# EAGLE board interactiveBoard (EAGLE 9.6.2)
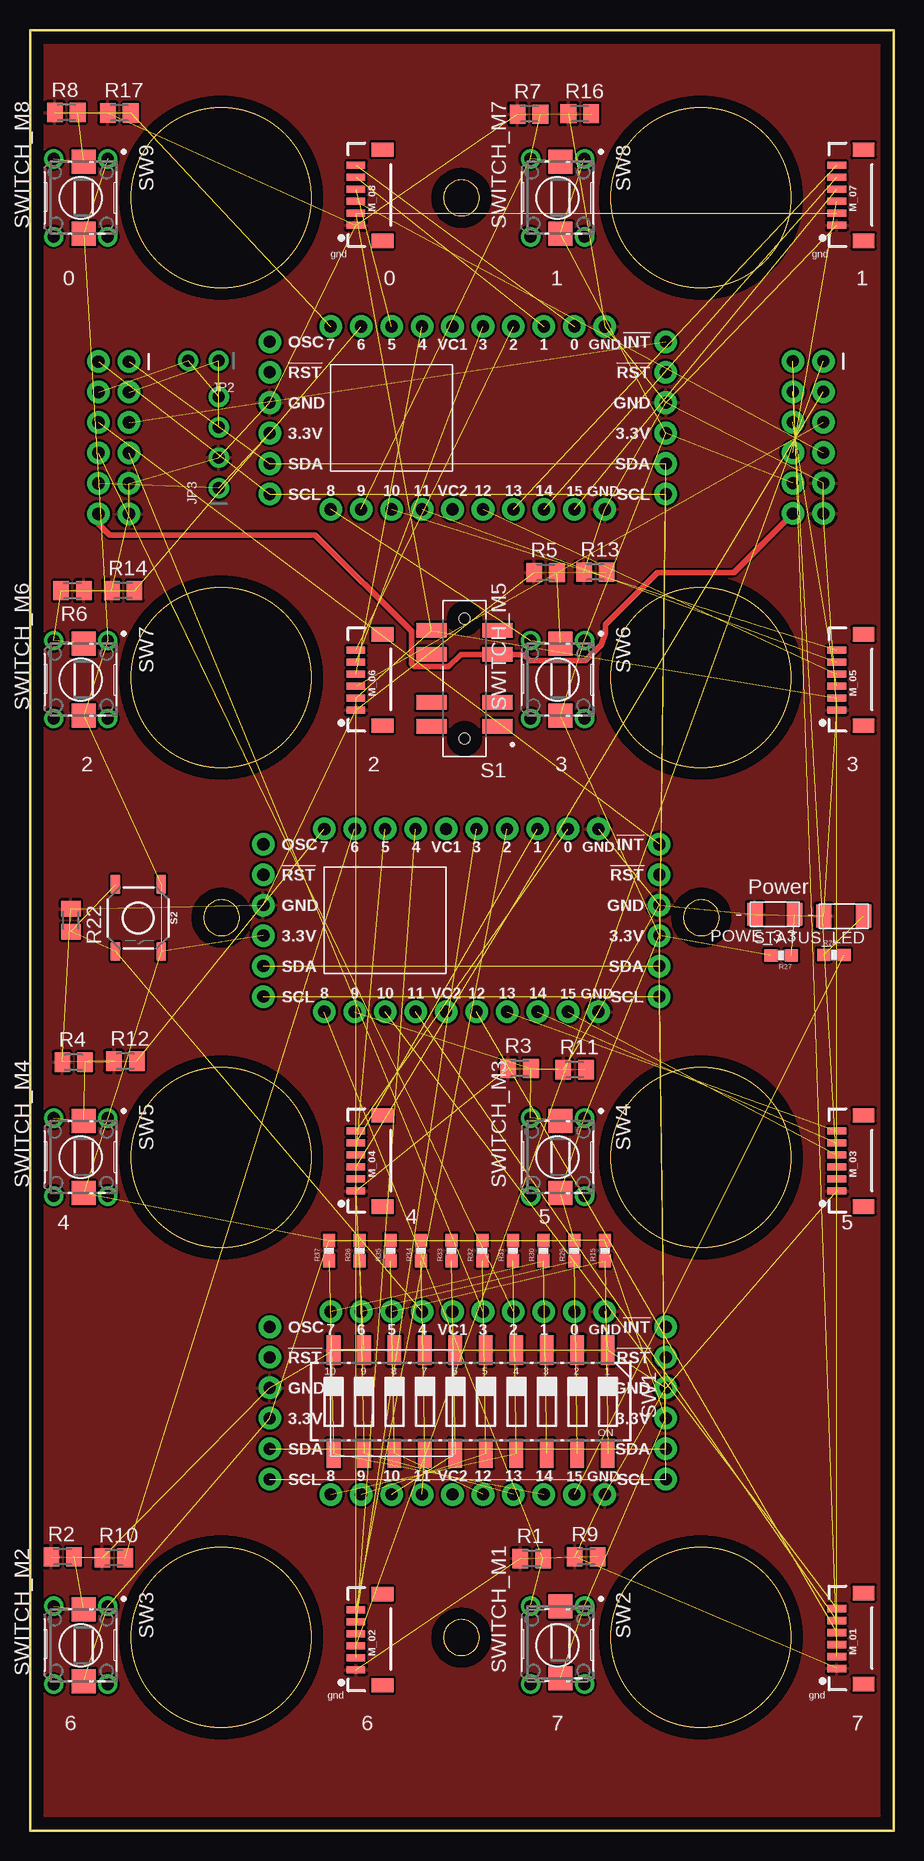
[diagram p0: board, top side]
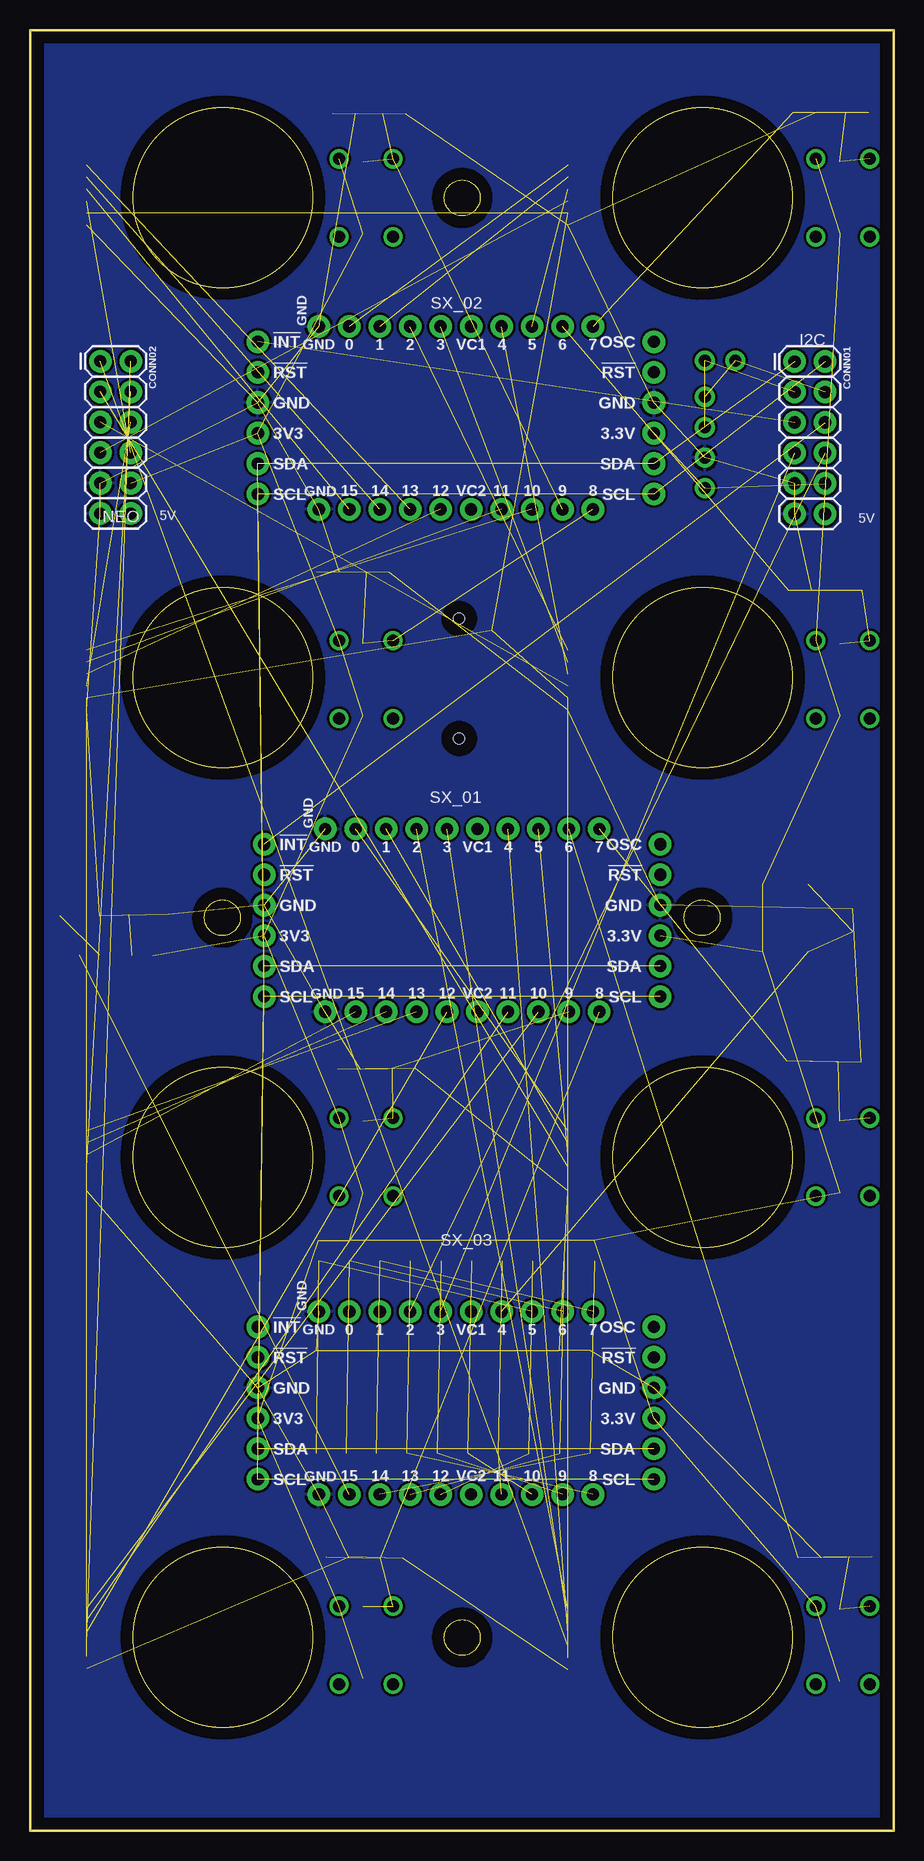
[diagram p1: board, bottom side, seen from below]

Size 72.01 x 150.09 mm. Coordinates in mm from the lower left corner, seen from the top.
Outline: 35.97,14.59 arc180 35.97,17.59 arc180 35.97,14.59
Outline: 15.97,74.59 arc180 15.97,77.59 arc180 15.97,74.59
Outline: 35.97,134.59 arc180 35.97,137.59 arc180 35.97,134.59
Outline: 55.97,74.59 arc180 55.97,77.59 arc180 55.97,74.59
Outline: 72.01,150.09 72.01,0 0,0 0,150.09 72.01,150.09
Outline: circle at 55.94,136.11 radius 7.49
Outline: circle at 55.94,96.11 radius 7.49
Outline: circle at 55.94,56.11 radius 7.49
Outline: circle at 55.94,16.11 radius 7.49
Outline: circle at 15.94,16.11 radius 7.49
Outline: circle at 15.94,56.11 radius 7.49
Outline: circle at 15.94,96.11 radius 7.49
Outline: circle at 15.94,136.11 radius 7.49
Copper layers (1*16): Top 0.035mm / dielectric 1.5mm / Bottom 0.035mm
Design rules "default": minimum track width 6mil, minimum drill 0.35mm, track to track 6mil, track to pad 6mil, pad to pad 6mil, via to via 6mil, smd to smd 6mil, copper to edge 40mil, drill to drill 6mil, minimum pad ring 10mil, minimum via ring 8mil, stop-mask expansion 4mil, vias tented up to drill 0mil, thermal gap 10mil
Net classes: 0 default: width 0.2 mm, clearance 0.2 mm; 1 gnd: width 0.2 mm, clearance 0.2 mm; 2 3v: width 0.45 mm, clearance 0.2 mm; 4 5v: width 0.45 mm, clearance 0.2 mm

## Footprints (pad centres in the part's own frame; a part is rotated, then mirrored left to right if it is on the bottom)
2X6 = drill 1.016 pad 1.88: 1 0,0; 2 0,2.54; 3 2.54,0; 4 2.54,2.54; 5 5.08,0; 6 5.08,2.54; 7 7.62,0; 8 7.62,2.54; 9 10.16,0; 10 10.16,2.54; 11 12.7,0; 12 12.7,2.54
1X02_ROUND = drill 1 pad 1.676: 1 -1.27,0; 2 1.27,0
1X04_ROUND = drill 1 pad 1.676: 1 -3.81,0; 2 -1.27,0; 3 1.27,0; 4 3.81,0
1X06-1MM = smd 0.6 x 1.55: 1 -2.54,1.27; 2 -1.54,1.27; 3 -0.54,1.27; 4 0.46,1.27; 5 1.46,1.27; 6 2.46,1.27 | smd 1.2 x 1.8: P$1 -3.84,-0.955; P$2 3.76,-0.955
LED1206FAB = smd 1.27 x 1.905: 1 -1.651,0; 2 1.651,0
M0805 = smd 1.3 x 1.6: 1 -0.95,0; 2 0.95,0
0603-RES = smd 1.1 x 1: 1 -0.85,0; 2 0.85,0
SW_JS207011SCQNR = smd 2.5 x 1.2: 1 -2.75,4; 2 -2.75,2; 3 -2.75,-2; 4 -2.75,-4; 5 2.75,4; 6 2.75,2; 7 2.75,-2; 8 2.75,-4 | hole 0.9: 0,5; 0,-5
TACTILE_SWITCH_SMD_5.2MM = smd 1.524 x 0.762: 1 -2.794,1.905; 2 2.794,1.905; 3 -2.794,-1.905; 4 2.794,-1.905
CTS-219-10 = smd 1.13 x 2.44: 1 -11.43,-4.3; 2 -8.89,-4.3; 3 -6.35,-4.3; 4 -3.81,-4.3; 5 -1.27,-4.3; 6 1.27,-4.3; 7 3.81,-4.3; 8 6.35,-4.3; 9 8.89,-4.3; 10 11.43,-4.3; 11 11.43,4.3; 12 8.89,4.3; 13 6.35,4.3; 14 3.81,4.3; 15 1.27,4.3; 16 -1.27,4.3; 17 -3.81,4.3; 18 -6.35,4.3; 19 -8.89,4.3; 20 -11.43,4.3
B3F-1000 = drill 1 pad 1.6: 1 -3.25,2.25; 2 3.25,2.25; 3 -3.25,-2.25; 4 3.25,-2.25
DTSM-3 = smd 2 x 2: 1 -3,0; 2 3,0
SX1509_HOLE = drill 1.016 pad 1.88: 0 -7.62,7.62; 1 -7.62,5.08; 2 -7.62,2.54; 3 -7.62,0; 3.3V 1.27,-17.78; 3.3V_2 1.27,15.24; 4 -7.62,-5.08; 5 -7.62,-7.62; 6 -7.62,-10.16; 7 -7.62,-12.7; 8 7.62,-12.7; 9 7.62,-10.16; 10 7.62,-7.62; 11 7.62,-5.08; 12 7.62,0; 13 7.62,2.54; 14 7.62,5.08; 15 7.62,7.62; GND -1.27,-17.78; GND_1 7.62,10.16; GND_2 -7.62,10.16; GND_3 -1.27,15.24; INT -6.35,15.24; OSC -6.35,-17.78; RST -3.81,-17.78; RST_2 -3.81,15.24; SCL 6.35,-17.78; SCL_2 6.35,15.24; SDA 3.81,-17.78; SDA_2 3.81,15.24; VC2 7.62,-2.54; VCC1 -7.62,-2.54

## Placement (x,y rotation side)
CONN01  2X6 FEMALE  [2X6]  8.25,122.45 270 bottom
CONN02  2X6 FEMALE  [2X6]  66.15,122.48 270 bottom
JP2  [1X02_ROUND]  14.45,122.53 180 top
JP3  [1X04_ROUND]  15.75,115.7 90 top
M_01  [1X06-1MM]  68.54,16.05 90 top
M_02  [1X06-1MM]  28.44,15.95 90 top
M_03  [1X06-1MM]  68.54,55.85 90 top
M_04  [1X06-1MM]  28.44,55.85 90 top
M_05  [1X06-1MM]  68.54,95.95 90 top
M_06  [1X06-1MM]  28.44,95.95 90 top
M_07  [1X06-1MM]  68.54,136.35 90 top
M_08  [1X06-1MM]  28.44,136.35 90 top
POWE_3.3  LEDFAB1206  [LED1206FAB]  62.1,76.38 180 top
R1  10k  [M0805]  41.83,22.67 0 top
R2  10k  [M0805]  2.73,22.83 0 top
R3  10k  [M0805]  40.82,63.54 0 top
R4  10K  [M0805]  3.64,64.05 0 top
R5  10k  [M0805]  42.98,104.85 0 top
R6  10k  [M0805]  3.54,103.35 180 top
R7  10k  [M0805]  41.61,143.08 0 top
R8  10k  [M0805]  3.03,143.21 0 top
R9  10K  [M0805]  46.38,22.81 0 top
R10  10K  [M0805]  6.99,22.73 0 top
R11  10K  [M0805]  45.42,63.42 0 top
R12  10K  [M0805]  7.95,64.13 0 top
R13  10K  [M0805]  47.14,104.9 0 top
R14  10K  [M0805]  7.77,103.35 0 top
R15  10K  [0603-RES]  47.93,48.35 90 top
R16  10K  [M0805]  45.85,143.1 0 top
R17  10K  [M0805]  7.44,143.18 0 top
R22  10K  [M0805]  3.41,75.88 270 top
R27  500  [0603-RES]  62.64,72.95 180 top
R28  500  [0603-RES]  67.03,73 0 top
R29  10K  [0603-RES]  45.38,48.35 90 top
R30  10K  [0603-RES]  42.82,48.35 90 top
R31  10K  [0603-RES]  40.27,48.35 90 top
R32  10K  [0603-RES]  37.71,48.35 90 top
R33  10K  [0603-RES]  35.16,48.35 90 top
R34  10K  [0603-RES]  32.61,48.35 90 top
R35  10K  [0603-RES]  30.05,48.35 90 top
R36  10K  [0603-RES]  27.5,48.35 90 top
R37  10K  [0603-RES]  24.94,48.35 90 top
S1  JS207011SCQNR  [SW_JS207011SCQNR]  36.22,96.04 180 top
S2  [TACTILE_SWITCH_SMD_5.2MM]  9.03,76.08 270 top
STATUS_LED  LEDFAB1206  [LED1206FAB]  67.84,76.23 180 top
SW1  219-10  [CTS-219-10]  36.74,35.74 180 top
SW2  B3F-1000  [B3F-1000]  43.99,15.46 270 top
SW3  B3F-1000  [B3F-1000]  4.23,15.46 270 top
SW4  B3F-1000  [B3F-1000]  43.99,56.13 270 top
SW5  B3F-1000  [B3F-1000]  4.23,56.13 270 top
SW6  B3F-1000  [B3F-1000]  43.99,95.94 270 top
SW7  B3F-1000  [B3F-1000]  4.23,95.94 270 top
SW8  B3F-1000  [B3F-1000]  43.99,136.09 270 top
SW9  B3F-1000  [B3F-1000]  4.23,136.09 270 top
SWITCH_M1  DTSM-3  [DTSM-3]  44.24,15.7 90 top
SWITCH_M2  DTSM-3  [DTSM-3]  4.48,15.46 90 top
SWITCH_M3  DTSM-3  [DTSM-3]  44.24,56.13 90 top
SWITCH_M4  DTSM-3  [DTSM-3]  4.48,56.13 90 top
SWITCH_M5  DTSM-3  [DTSM-3]  44.24,95.94 90 top
SWITCH_M6  DTSM-3  [DTSM-3]  4.48,95.94 90 top
SWITCH_M7  DTSM-3  [DTSM-3]  44.24,136.09 90 top
SWITCH_M8  DTSM-3  [DTSM-3]  4.48,136.09 90 top
U$1  SX1509HOLE  [SX1509_HOLE]  37.24,75.87 270 top
U$2  SX1509HOLE  [SX1509_HOLE]  37.77,117.75 270 top
U$3  SX1509HOLE  [SX1509_HOLE]  37.77,35.64 270 top

## Library data of the parts
CONN01 CONN02 = SparkFun-Connectors; PROD_ID: CONN-12423
JP2 JP3 = microbuilder
M_01-M_08 = SparkFun-Connectors; PROD_ID: CONN-08249; SF_ID: GPS-00579
POWE_3.3 STATUS_LED = fab
R1-R14 R16 R17 R22 = resistor
R15 R27-R37 = SparkFun-Resistors; PROD_ID: RES-00824
S1 = JS207011SCQNR; AVAILABILITY: Unavailable; DESCRIPTION: Slide Switch DP3T Surface Mount; MF: C&K; MP: JS207011SCQNR; PACKAGE: None; PRICE: None
S2 = SparkFun-Switches; PROD_ID: SWCH-08247; SF_SKU: COM-08720
SW1 = switch-dil; MF: SLI (CML/IDI); MPN: 219-10PK; OC_FARNELL: unknown; OC_NEWARK: 19M0224
SW2-SW9 = Switch; CREATED_BY: PCBLayout.com; DIGI_KEY_PART_NUMBER: SW400-ND; MANUFACTURER: Omron Electronics Inc-EMC Div; MPN: B3F-1000; PACKAGE: SPST-NO
SWITCH_M1-SWITCH_M8 = switch-tact
U$1-U$3 = SX1509_s

## Nets
0_SX1: M_04.6 U$1.0
0_SX2: M_08.6 U$2.0
0_SX3: U$3.0
1_SX1: M_04.5 U$1.1
1_SX2: M_08.5 U$2.1
1_SX3: U$3.1
2_SX1: M_02.6 U$1.2
2_SX2: M_06.6 U$2.2
2_SX3: CONN01.8 U$3.2
3.3V [3v]: CONN01.10 CONN02.10 JP3.1 R15.2 R27.2 R29.2 R30.2 R31.2 R32.2 R33.2 R34.2 R35.2 R36.2 R37.2 S2.1 S2.2 SW2.1 SW3.1 SW4.1 SW5.1 SW6.1 SW7.1 SW8.1 SW9.1 SWITCH_M1.1 SWITCH_M2.1 SWITCH_M3.1 SWITCH_M4.1 SWITCH_M5.1 SWITCH_M6.1 SWITCH_M7.1 SWITCH_M8.1 U$1.3.3V U$1.3.3V_2 U$2.3.3V U$2.3.3V_2 U$3.3.3V U$3.3.3V_2
3_SX1: M_02.5 U$1.3
3_SX2: M_06.5 U$2.3
3_SX3: CONN01.7 U$3.3
4_SX1: M_02.4 U$1.4
4_SX2: M_06.4 U$2.4
4_SX3: R22.2 S2.3 S2.4 U$3.4
5_SX1: M_04.4 U$1.5
5_SX2: M_08.4 U$2.5
5_SX3: R15.1 SW1.20 U$3.5
6_SX1: R2.2 R10.2 SW3.3 SWITCH_M2.2 U$1.6
6_SX2: R6.2 R14.2 SW7.3 SWITCH_M6.2 U$2.6
6_SX3: R29.1 SW1.19 U$3.6
7_SX1: R4.2 R12.2 SW5.3 SWITCH_M4.2 U$1.7
7_SX2: R8.2 R17.2 SW9.3 SWITCH_M8.2 U$2.7
7_SX3: R30.1 SW1.18 U$3.7
8_SX1: R1.2 R9.2 SW2.3 SWITCH_M1.2 U$1.8
8_SX2: R5.2 R13.2 SW6.3 SWITCH_M5.2 U$2.8
8_SX3: R31.1 SW1.17 U$3.8
9_SX1: R3.2 R11.2 SW4.3 SWITCH_M3.2 U$1.9
9_SX2: R7.2 R16.2 SW8.3 SWITCH_M7.2 U$2.9
9_SX3: R32.1 SW1.16 U$3.9
10_SX1: M_01.6 U$1.10
10_SX2: M_05.6 U$2.10
10_SX3: R33.1 SW1.15 U$3.10
11_SX1: M_01.5 U$1.11
11_SX2: M_05.5 U$2.11
11_SX3: R34.1 SW1.14 U$3.11
12_SX1: M_01.4 U$1.12
12_SX2: M_05.4 U$2.12
12_SX3: R35.1 SW1.13 U$3.12
13_SX1: M_03.6 U$1.13
13_SX2: M_07.6 U$2.13
13_SX3: R36.1 SW1.12 U$3.13
14_SX1: M_03.5 U$1.14
14_SX2: M_07.5 U$2.14
14_SX3: R37.1 SW1.11 U$3.14
15_SX1: M_03.4 U$1.15
15_SX2: M_07.4 U$2.15
15_SX3: R28.2 U$3.15
CAN_RX2: CONN01.4 JP2.2 JP3.4
CAN_TX2: CONN01.3 JP2.1 JP3.3
GND_MCU: CONN01.9 CONN01.11 CONN02.9 CONN02.11 JP3.2 M_01.1 M_02.1 M_03.1 M_04.1 M_05.1 M_06.1 M_07.1 M_08.1 POWE_3.3.2 R1.1 R2.1 R3.1 R4.1 R5.1 R6.1 R7.1 R8.1 R9.1 R10.1 R11.1 R12.1 R13.1 R14.1 R16.1 R17.1 R22.1 STATUS_LED.2 SW1.1 SW1.2 SW1.3 SW1.4 SW1.5 SW1.6 SW1.7 SW1.8 SW1.9 SW1.10 U$1.GND U$1.GND_1 U$1.GND_2 U$1.GND_3 U$2.GND U$2.GND_1 U$2.GND_2 U$2.GND_3 U$3.GND U$3.GND_1 U$3.GND_2 U$3.GND_3
INT_01: CONN01.6 U$1.INT
INT_02: CONN01.5 U$2.INT
N$1: S1.7
N$13: R28.1 STATUS_LED.1
N$25: U$3.INT
N$193: POWE_3.3.1 R27.1
NEOPIXEL_01: CONN02.2 M_01.3
NEOPIXEL_02: CONN02.1 M_02.3
NEOPIXEL_03: CONN02.4 M_03.3
NEOPIXEL_04: CONN02.3 M_04.3
NEOPIXEL_05: CONN02.6 M_05.3
NEOPIXEL_06: CONN02.5 M_06.3
NEOPIXEL_07: CONN02.8 M_07.3
NEOPIXEL_08: CONN02.7 M_08.3
SCL_00: CONN01.2 U$1.SCL U$1.SCL_2 U$2.SCL U$2.SCL_2 U$3.SCL U$3.SCL_2
SDA_00: CONN01.1 U$1.SDA U$1.SDA_2 U$2.SDA U$2.SDA_2 U$3.SDA U$3.SDA_2
VCC_5V [5v]: M_01.2 M_02.2 M_03.2 M_04.2 M_05.2 M_06.2 M_07.2 M_08.2 S1.8
VCC_5V_IN [5v]: CONN01.12 CONN02.12 S1.3

## Tracks (layer width: path | path; a pad name or v marks a point on that pad's centre or on a via)
0_SX1  (1 unrouted)
0_SX2  (1 unrouted)
1_SX1  (1 unrouted)
1_SX2  (1 unrouted)
2_SX1  (1 unrouted)
2_SX2  (1 unrouted)
2_SX3  (1 unrouted)
3.3V  (37 unrouted)
3_SX1  (1 unrouted)
3_SX2  (1 unrouted)
3_SX3  (1 unrouted)
4_SX1  (1 unrouted)
4_SX2  (1 unrouted)
4_SX3  (3 unrouted)
5_SX1  (1 unrouted)
5_SX2  (1 unrouted)
5_SX3  (2 unrouted)
6_SX1  (4 unrouted)
6_SX2  (4 unrouted)
6_SX3  (2 unrouted)
7_SX1  (4 unrouted)
7_SX2  (4 unrouted)
7_SX3  (2 unrouted)
8_SX1  (4 unrouted)
8_SX2  (4 unrouted)
8_SX3  (2 unrouted)
9_SX1  (4 unrouted)
9_SX2  (4 unrouted)
9_SX3  (2 unrouted)
10_SX1  (1 unrouted)
10_SX2  (1 unrouted)
10_SX3  (2 unrouted)
11_SX1  (1 unrouted)
11_SX2  (1 unrouted)
11_SX3  (2 unrouted)
12_SX1  (1 unrouted)
12_SX2  (1 unrouted)
12_SX3  (2 unrouted)
13_SX1  (1 unrouted)
13_SX2  (1 unrouted)
13_SX3  (2 unrouted)
14_SX1  (1 unrouted)
14_SX2  (1 unrouted)
14_SX3  (2 unrouted)
15_SX1  (1 unrouted)
15_SX2  (1 unrouted)
15_SX3  (1 unrouted)
CAN_RX2  (2 unrouted)
CAN_TX2  (2 unrouted)
GND_MCU  (53 unrouted)
  pour Top: -16.97,153.11 108.15,153.11 108.15,-12.5 -16.97,-12.5
  pour Bottom: -11.94,157.91 113.31,157.91 113.31,-9.7 -11.94,-9.7
INT_01  (1 unrouted)
INT_02  (1 unrouted)
N$13  (1 unrouted)
N$193  (1 unrouted)
NEOPIXEL_01  (1 unrouted)
NEOPIXEL_02  (1 unrouted)
NEOPIXEL_03  (1 unrouted)
NEOPIXEL_04  (1 unrouted)
NEOPIXEL_05  (1 unrouted)
NEOPIXEL_06  (1 unrouted)
NEOPIXEL_07  (1 unrouted)
NEOPIXEL_08  (1 unrouted)
SCL_00  (6 unrouted)
SDA_00  (6 unrouted)
VCC_5V  (8 unrouted)
VCC_5V_IN
  Top 0.45: CONN02.12 58.67,104.84 52.32,104.84 47.99,100.51 47.99,99.81 47.64,98.85 46.3,97.51 41.69,97.51 41.16,98.04 S1.3 35.92,98.04 34.9,97.01 32.04,97.01 31.8,97.26 31.8,99.98 23.77,108 6.63,108 5.72,108.91 CONN01.12

## Text on the board
tPlace: gnd | gnd | 0 | 0 | 1 | 1 | 2 | 2 | 3 | 3 | Power | - | - | 4 | 5 | 4 | 5 | gnd | gnd | 6 | 6 | 7 | 7
bPlace: SX_02 | I2C | 5V | 5V | NEO | SX_01 | SX_03
Document: I2C | NEO | 3.3V | 5V | GND | 5V | GND